# EAGLE board RFM69Pi (EAGLE 9.2.2)
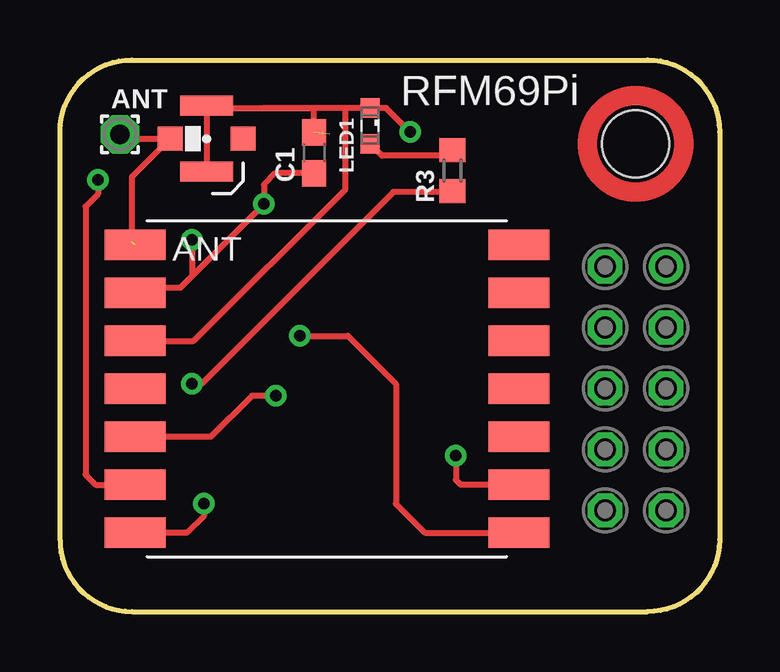
[diagram p0: board, top side]
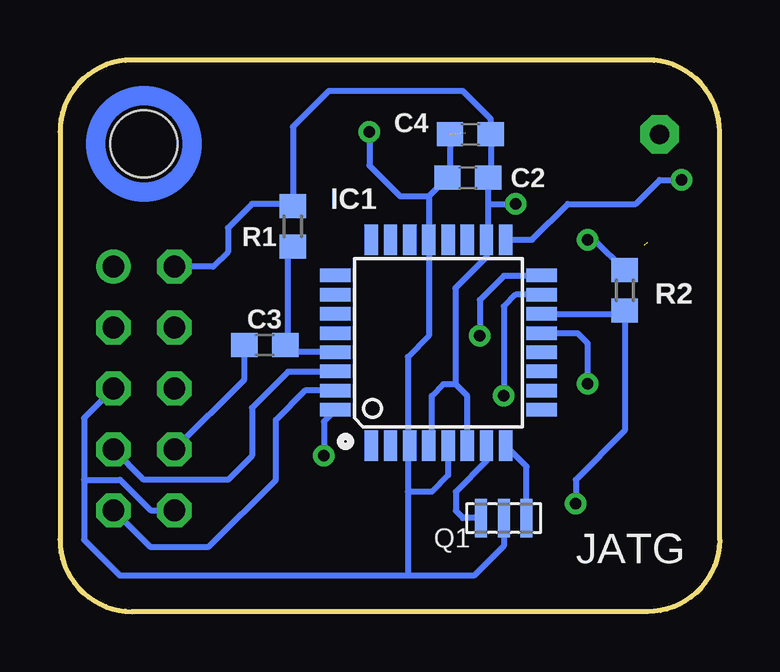
[diagram p1: board, bottom side, seen from below]

Size 27.5 x 23 mm. Coordinates in mm from the lower left corner, seen from the top.
Outline: 3,0 24.5,0 arc90 27.5,3 27.5,20 arc90 24.5,23 3,23 arc90 0,20 0,3 arc90 3,0
Copper layers (1*16): Top 0.035mm / dielectric 1.5mm / Bottom 0.035mm
Design rules "default *": minimum track width 10mil, minimum drill 19mil, track to track 6mil, track to pad 6mil, pad to pad 6mil, via to via 6mil, smd to smd 6mil, copper to edge 20mil, drill to drill 8mil, minimum pad ring 10mil, minimum via ring 8mil, stop-mask expansion 4mil, vias tented up to drill 0.6mm, thermal gap 10mil
Net classes: 0 default: width 0.203 mm, drill 0.203 mm, clearance 0.205 mm; 1 power: width 0.254 mm, drill 0.254 mm, clearance 0.205 mm to class 0, clearance 0.254 mm
Holes 2.8 mm at 24,19.5

## Footprints (pad centres in the part's own frame; a part is rotated, then mirrored left to right if it is on the bottom)
C0603 = smd 1.1 x 1: 1 -0.85,0; 2 0.85,0
CON-LSTA_FE05-2 = drill 0.914: 1 -5.08,1.27 | drill 0.914 octagon: 2 -5.08,-1.27; 3 -2.54,1.27; 4 -2.54,-1.27; 5 0,1.27; 6 0,-1.27; 7 2.54,1.27; 8 2.54,-1.27; 9 5.08,1.27; 10 5.08,-1.27
TQFP32-08 = smd 1.27 x 0.559: 1 -4.293,2.8; 2 -4.293,2; 3 -4.293,1.2; 4 -4.293,0.4; 5 -4.293,-0.4; 6 -4.293,-1.2; 7 -4.293,-2; 8 -4.293,-2.8; 17 4.293,-2.8; 18 4.293,-2; 19 4.293,-1.2; 20 4.293,-0.4; 21 4.293,0.4; 22 4.293,1.2; 23 4.293,2; 24 4.293,2.8 | smd 0.559 x 1.27: 9 -2.8,-4.293; 10 -2,-4.293; 11 -1.2,-4.293; 12 -0.4,-4.293; 13 0.4,-4.293; 14 1.2,-4.293; 15 2,-4.293; 16 2.8,-4.293; 25 2.8,4.293; 26 2,4.293; 27 1.2,4.293; 28 0.4,4.293; 29 -0.4,4.293; 30 -1.2,4.293; 31 -2,4.293; 32 -2.8,4.293
U.FL = smd 2.2 x 0.85: 1 0,1.375; 2 0,-1.375 | smd 1.05 x 1: FEED 1.525,0; NC -1.525,0
SML0603 = smd 0.8 x 0.8: A 0.75,0; C -0.75,0
1,6/0,8 = drill 0.813 pad 1.6 octagon: 1 0,0
RESONATOR_MURATA2 = smd 0.5 x 1.6: 1 -0.95,0; 2 0,0; 3 0.95,0
R0603 = smd 1 x 1.1: 1 -0.85,0; 2 0.85,0
RFM12B = smd 2.54 x 1.27: ANT 8,-6; FFS -8,2; GND 8,-2; IRQ -8,4; P$8 -8,0; P$9 -8,-2; P$10 -8,-4; P$12 -8,-6; P$16 8,0; SCK 8,4; SDI 8,2; SDO -8,6; SEL 8,6; VDD 8,-4

## Placement (x,y rotation side)
C1  10uF  [C0603]  10.59,19.13 270 top
C2  0.1uF  [C0603]  10.49,18.09 180 bottom
C3  0.1uF  [C0603]  18.96,11.11 0 bottom
C4  0.1uF  [C0603]  10.39,19.91 180 bottom
GPIO_1  [CON-LSTA_FE05-2]  24,9.3 270 top
IC1  ATMEGA328P  [TQFP32-08]  11.72,11.21 90 bottom
J1  U.FL  [U.FL]  6.11,19.72 180 top
LED1  [SML0603]  12.93,20.25 270 top
PAD2  [1,6/0,8]  2.5,19.9 0 top
Q1  [RESONATOR_MURATA2]  9,3.9 0 bottom
R1  10K  [R0603]  17.79,16.07 90 bottom
R2  10K  [R0603]  3.95,13.39 90 bottom
R3  1K  [R0603]  16.37,18.39 270 top
RFM69CW  RFM69CW  [RFM12B]  11.13,9.28 180 top

## Library data of the parts
C1-C3 = rcl; SPICEPREFIX: C
C4 = resistor
GPIO_1 = RFM69Pi; OC_FARNELL: unknown; OC_NEWARK: unknown
IC1 = SparkFun
J1 = SparkFun-Connectors; PROD_ID: CONN-09193; SF_ID: WRL-09144
LED1 = led
PAD2 = wirepad
Q1 = m-pad-2.1
R1-R3 = adafruit
RFM69CW = RFM69Pi

## Nets
+3V3 [power]: C1.2 C2.1 C4.1 GPIO_1.2 IC1.4 IC1.6 IC1.18 R1.2 R2.2 RFM69CW.VDD
_RESET: C3.1 GPIO_1.8
A0: IC1.23
A1: IC1.24
A2: IC1.25
A3: IC1.26
A4/SDA: IC1.27
A5/SCL: IC1.28
A6: IC1.19
A7: IC1.22
D0/RX: GPIO_1.7 IC1.30
D1/TX: GPIO_1.9 IC1.31
D2: IC1.32 RFM69CW.IRQ
D3: IC1.1
D4: IC1.2
D5: IC1.9
D6: IC1.10
D7: IC1.11
D8: IC1.12
D9: IC1.13 R3.2
D10: IC1.14 R2.1 RFM69CW.SEL
D11/MOSI: IC1.15 RFM69CW.SDI
D12/MISO: IC1.16 RFM69CW.SDO
D13/SCK: IC1.17 RFM69CW.SCK
GND [power]: C1.1 C2.2 C4.2 GPIO_1.5 GPIO_1.10 IC1.3 IC1.5 IC1.21 J1.1 J1.2 LED1.C Q1.2 RFM69CW.GND
N$1: IC1.7 Q1.1
N$2: IC1.8 Q1.3
N$3: LED1.A R3.1
N$6 [power]: J1.FEED PAD2.1 RFM69CW.ANT
RESET: C3.2 IC1.29 R1.1

## Tracks (layer width: path | path; a pad name or v marks a point on that pad's centre or on a via)
+3V3  (via drill 0.48)
  Top 0.254: 2.92,13.5 RFM69CW.VDD 3.35,13.5 5,13.5 5.5,14 | C1.2 8.98,18.28 8.5,17.8 v8.5,17 5.5,14 | v5.5,15.5 5.5,14
  Bottom 0.254: 18.06,17.18 R1.2 | 9.64,17 9.64,15.58 IC1.18 9.72,14.78 11.02,13.48 11.02,9.48 | 9.64,17 C2.1 9.54,18.2 C4.1 9.54,20.54 10.7,21.7 16.3,21.7 17.79,20.21 R1.2 | GPIO_1.2 21.12,14.38 20.5,15 20.5,16 19.5,17 17.88,17 R1.2 | IC1.6 10.52,8.98 11.02,9.48 | IC1.4 12,7.04 12,9 11.52,9.48 11.02,9.48 | R2.2 5.21,15.5 v5.5,15.5 | 9.64,17 v8.5,17
_RESET
  Bottom 0.254: GPIO_1.8 19.81,9.68 C3.1
D0/RX
  Bottom 0.254: GPIO_1.7 24.01,5.5 20.5,5.5 19.5,6.5 19.5,8.5 18,10 16.02,10 IC1.30 16.49,10.01
D1/TX
  Bottom 0.254: GPIO_1.9 23.75,2.7 21.3,2.7 18.5,5.5 18.5,8 17.29,9.21 IC1.31
D2  (via drill 0.48)
  Top 0.254: 20.22,5.28 RFM69CW.IRQ 16.72,5.28 16.5,5.5 v16.5,6.5
  Bottom 0.254: IC1.32 16.5,7.92 v16.5,6.5
D9  (via drill 0.48)
  Top 0.254: R3.2 16.14,17.54 16.1,17.5 13.9,17.5 5.9,9.5 v5.5,9.5
  Bottom 0.254: 7.54,11.5 IC1.13 5.93,11.61 5.5,11.19 v5.5,9.5
D10  (via drill 0.48)
  Top 0.254: v6,4.5 6,4 5.28,3.28 RFM69CW.SEL
  Bottom 0.254: IC1.14 4.08,12.41 R2.1 3.95,7.55 6,5.5 v6,4.5
D11/MOSI  (via drill 0.48)
  Top 0.254: 4.22,7.28 RFM69CW.SDI 6.28,7.28 8,9 v9,9
  Bottom 0.254: v9,9 9,12.72 8.51,13.21 IC1.15
D12/MISO  (via drill 0.48)
  Top 0.254: RFM69CW.SDO 15.22,3.28 14,4.5 14,9.5 12,11.5 v10,11.5
  Bottom 0.254: IC1.16 9,14 10,13 v10,11.5
D13/SCK  (via drill 0.48)
  Top 0.254: v1.59,18 1.59,17.41 1.07,16.89 1.07,5.7 1.49,5.28 RFM69CW.SCK
  Bottom 0.254: IC1.17 7.82,15.51 6.32,17 3.5,17 2.5,18 v1.59,18 2,18
GND  (via drill 0.48)  (1 unrouted)
  Top 0.254: 3.58,11.28 RFM69CW.GND | J1.1 J1.2 6.21,21 10.59,21 C1.1 | RFM69CW.GND 2.49,11.28 | 8.5,21 11.9,21 | 11.9,21 LED1.C 13.6,21 v14.6,20 | RFM69CW.GND 5.58,11.28 11.9,17.6 11.9,21
  Bottom 0.254: 12.12,17.32 C2.2 11.24,18.2 C4.2 | 12.12,17.32 IC1.21 12.12,11.51 13,10.62 13,7 IC1.3 | GPIO_1.5 26.5,8.07 26.5,5.5 | 26.5,5.5 26.5,3 25,1.5 13,1.5 | 12.78,7.06 IC1.3 | 13,1.5 10.24,1.5 9,2.74 Q1.2 | IC1.5 11.32,5.68 12,5 13,5 | 13,5 13,1.5 | 26.5,5.5 25,5.5 23.72,4.22 GPIO_1.10 | IC1.3 13,6.84 13,5 | 12.12,17.32 13.32,17.32 14.6,18.6 v14.6,20
N$1
  Bottom 0.254: IC1.7 9.72,6.28 11,5 11,4.2 10.7,3.9 Q1.1
N$2
  Bottom 0.254: Q1.3 8.05,6.05 IC1.8
N$3
  Top 0.254: LED1.A 13.43,19 16.13,19 R3.1
N$6  (1 unrouted)
  Top 0.254: 3,15.42 3,18.13 J1.FEED 2.68,19.72 PAD2.1
RESET
  Bottom 0.254: 18,15.01 R1.1 18,15.01 18,11 | IC1.29 17.82,10.81 18,11 | 18,11 C3.2
(copper drawn outside any net)
  shapes: Bottom circle x1, Top circle x1

## Text on the board
tNames: ANT | RFM69Pi
bNames: C3 | JATG